# Altium PCB UVEEC LED Cube.PcbDoc
Units mm, origin at the board's own origin, x right, y up, seen from the top; angles counter-clockwise.
Board outline 40 x 40 mm, 2 copper layers (Top Layer, Bottom Layer); 10 components, 8 nets, 39 pads, 6 vias.
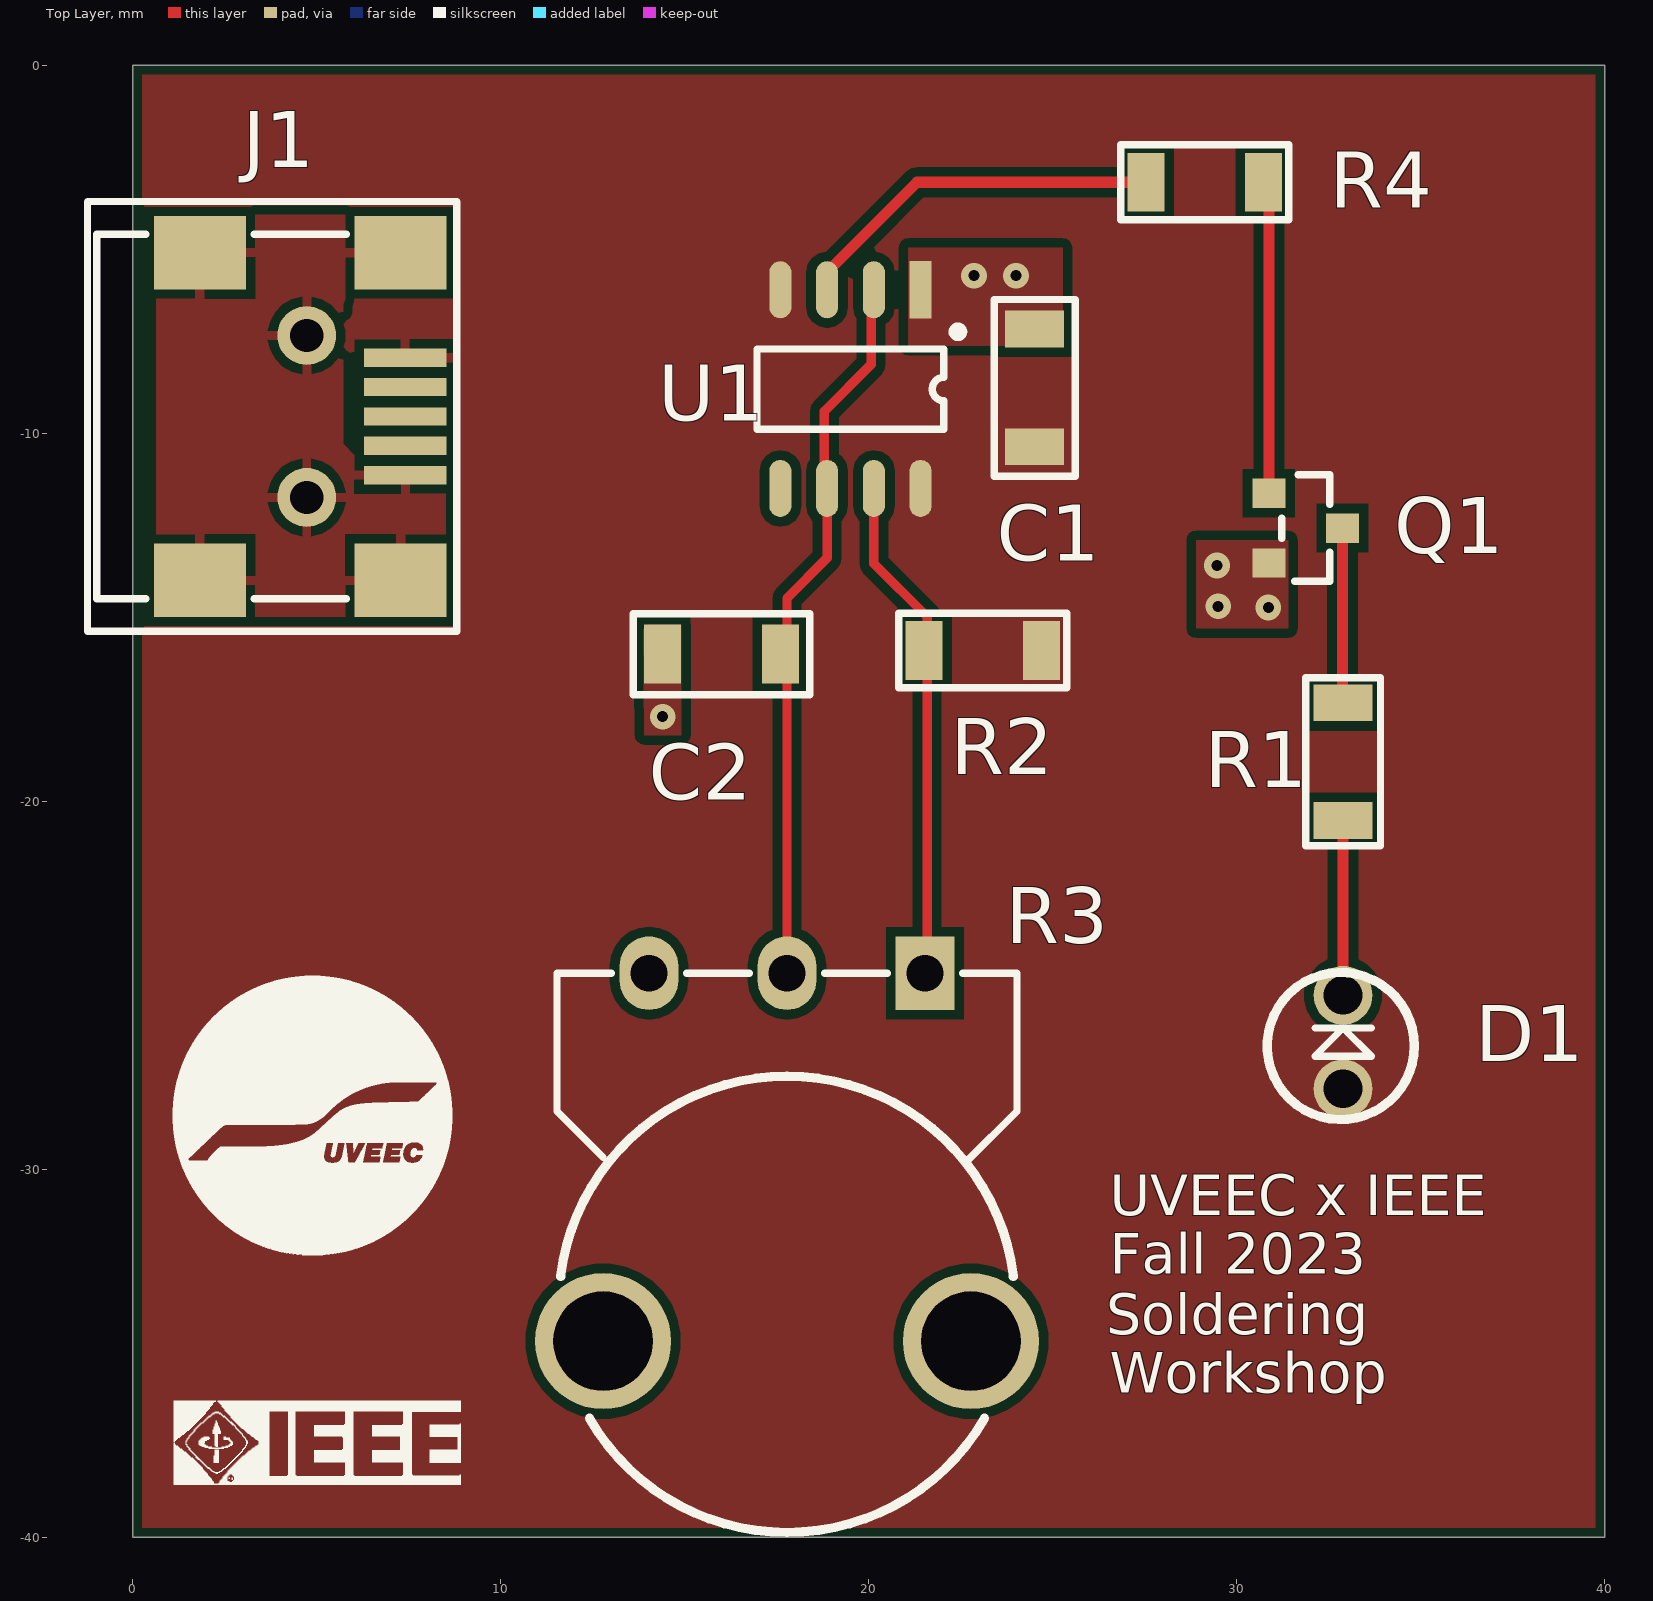
[diagram p0: Top Layer view]
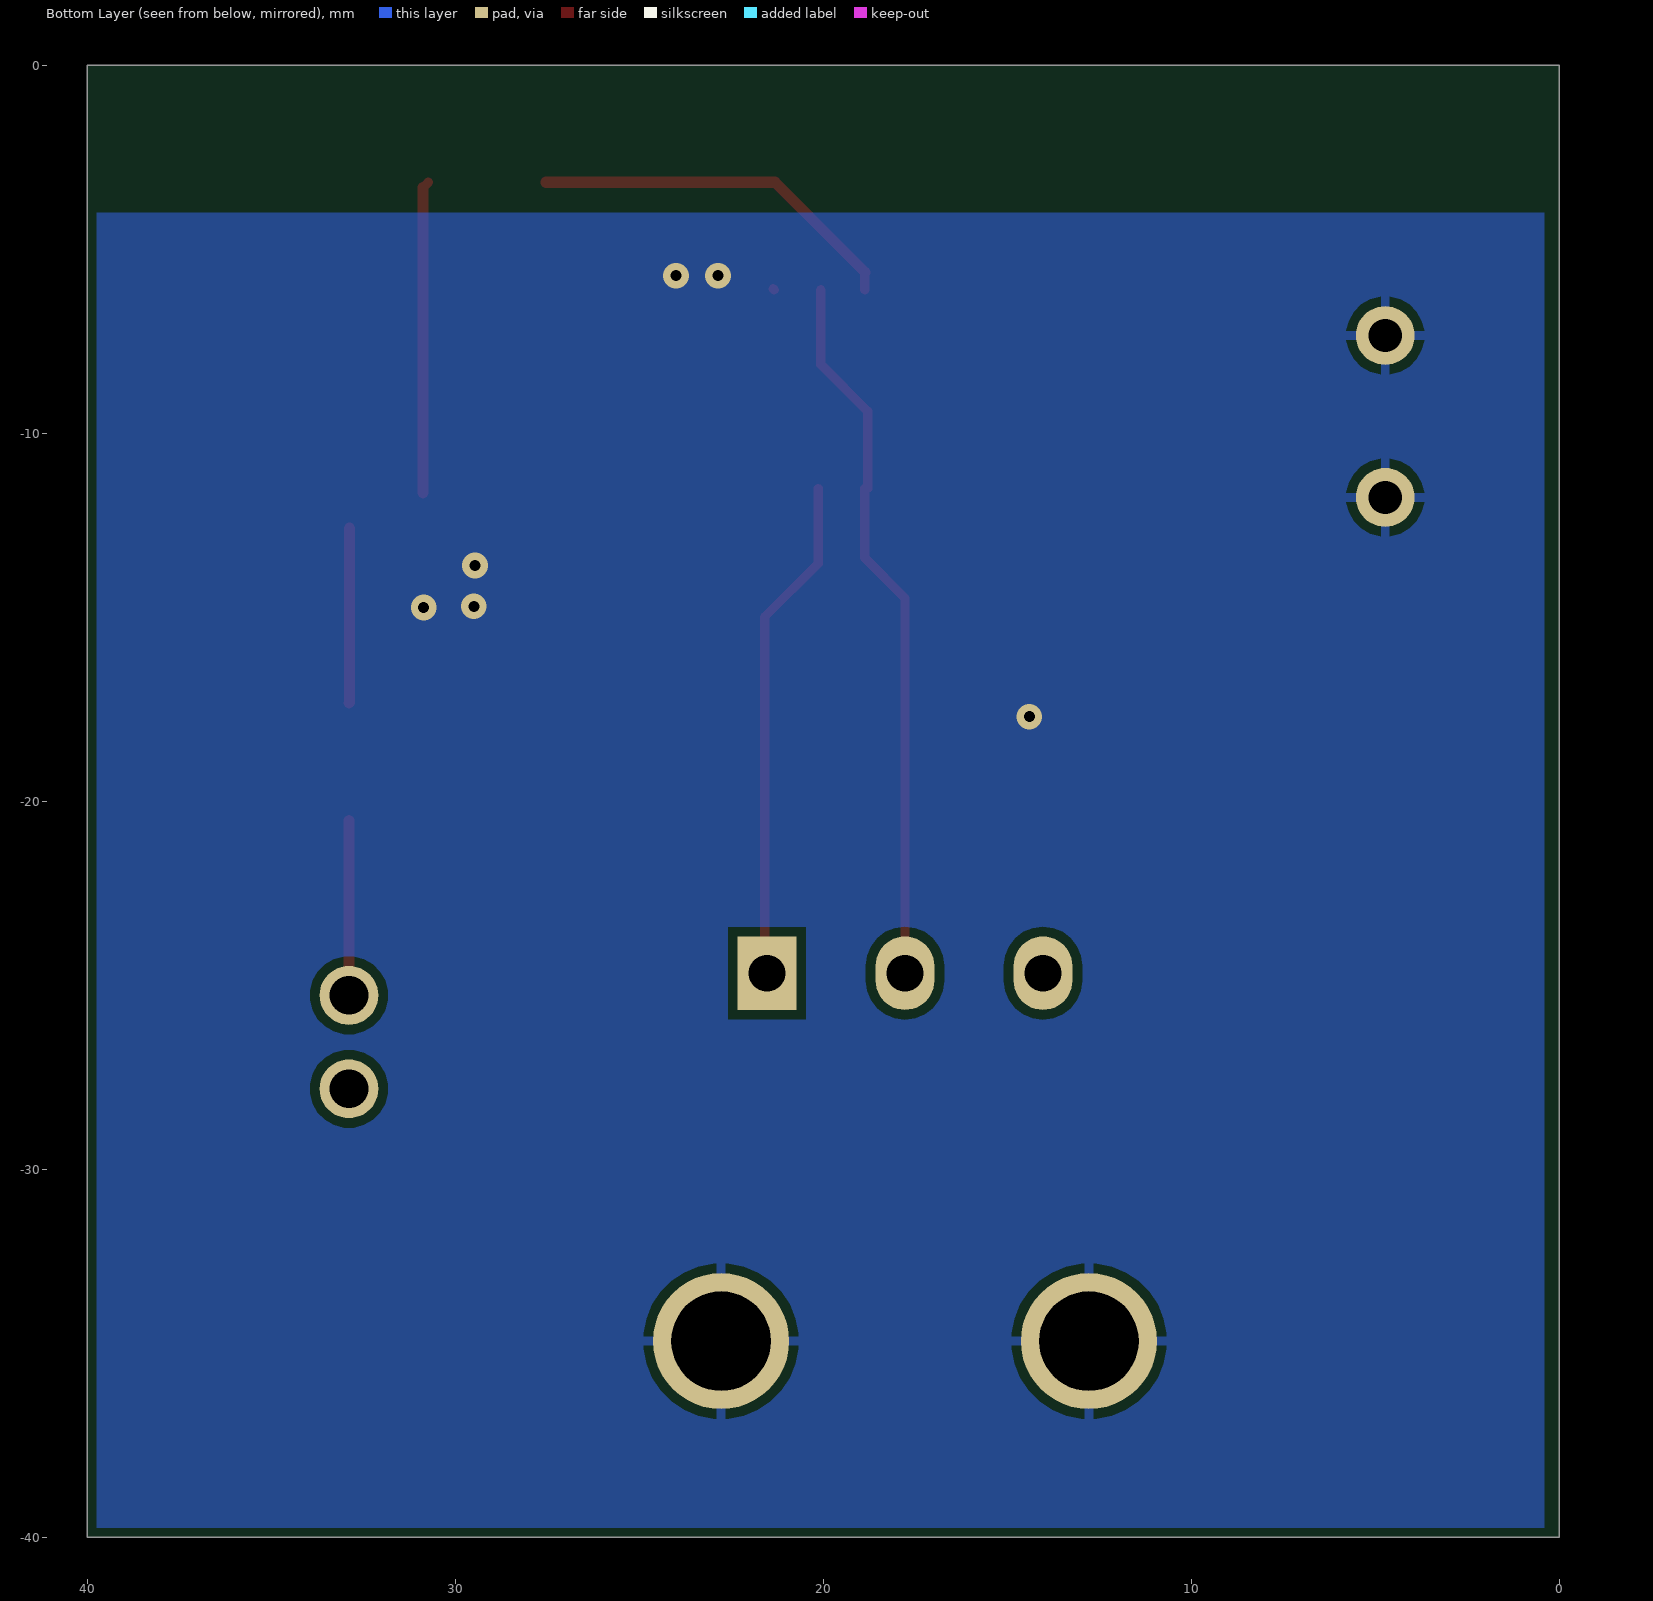
[diagram p1: Bottom Layer view, seen from below]
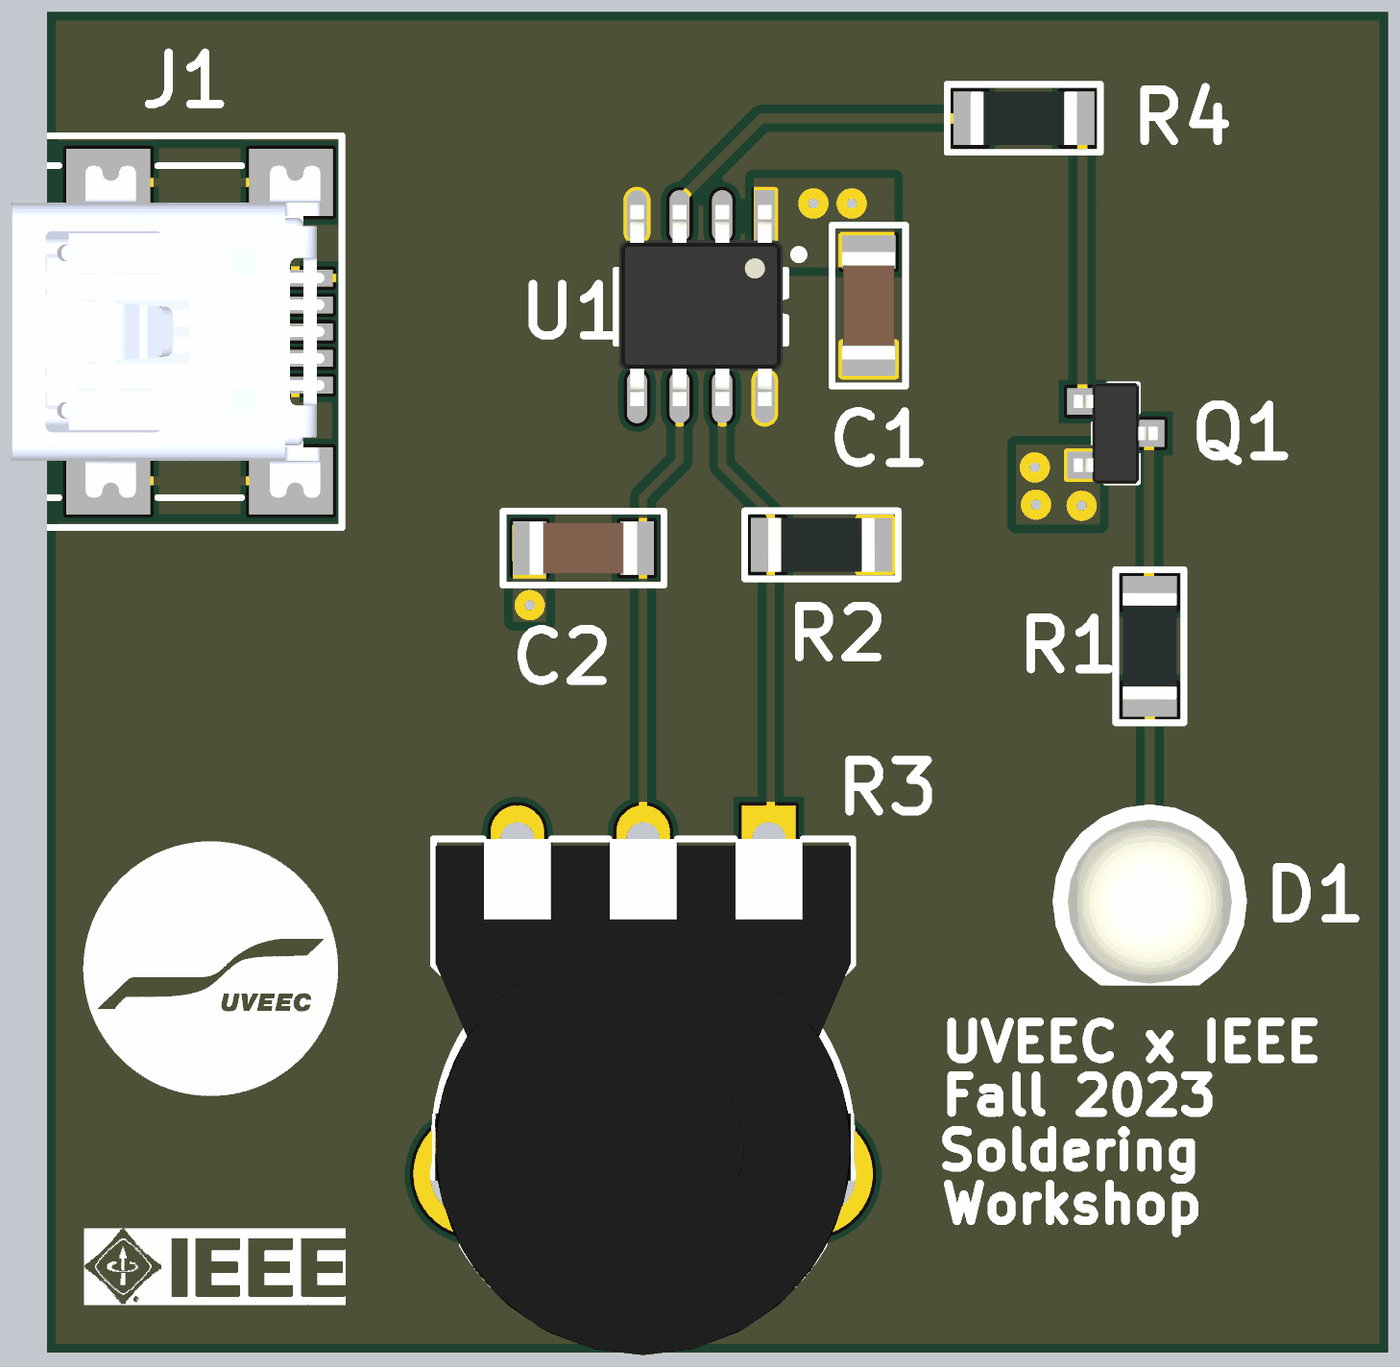
[diagram p2: 3D render of the assembled board from above, using the file's embedded part models]

## Layer stack, top to bottom
Top Solder: solder mask 0.0102, Solder Resist, Dk 3.5
Top Layer: signal copper 0.0356
Dielectric 1: dielectric 0.32, FR-4, Dk 4.8
Bottom Layer: signal copper 0.0356
Bottom Solder: solder mask 0.0102, Solder Resist, Dk 3.5

## Board outline
0,-40 40,-40 40,0 0,0

## Design rules (kind name [scope] priority, off if disabled: settings)
BoardOutlineClearance [All] p1: gap=0.254 ignorepadtopadclearanceinfootprint=FALSE except(0: Arc-SplitContinuation Track-SplitContinuation SMDPad-SplitContinuation THPad-SplitContinuation Via-SplitContinuation Fill-SplitContinuation Poly-SplitContinuation Region-SplitContinuation Text-SplitContinuation)
Clearance [All] p1: gap=0.254 ignorepadtopadclearanceinfootprint=FALSE except(0: SMDPad-Hole THPad-Hole Via-Hole Fill-Hole Poly-Hole Region-Hole Text-Hole)
Height [All] p1: minheight=0 maxheight=35 prefheight=12.7
HoleSize [All] p1: absolutevalues=TRUE maxlimit=3.5 minlimit=0.025 maxpercent=80.000 minpercent=20.000
MinimumSolderMaskSliver [All] p1: minsoldermaskwidth=0.2
PolygonConnect [All] p1: connectstyle=Direct reliefconductorwidth=0.254 reliefentries=4 polygonreliefangle="90 Angle" airgapwidth=0.254
RoutingVias [All] p1: holewidth=0.711 width=1.27 viastyle="Through Hole" minholewidth=0.711 minwidth=1.27 maxholewidth=0.711 maxwidth=1.27
SolderMaskExpansion [All] p1: expansion=0.102 istentingtop=FALSE
Width [All] p1: maxlimit=0.5 minlimit=0.254 preferedwidth=0.254 minimp=50.000000 maximp=50.000000 favimp=50.000000
27 further rules are at their usual default settings.

## Components (designator, comment, footprint, x,y, rotation, side; value= is the part's Value field where it differs from the comment)
C1 "1u" "Capacitor 1206" 24.511,-8.763 r90 top value=1uF
C2 "0.1u" "Capacitor 1206" 16,-16 r180 top value=100nF
D1 "HL3P-BF60-C00DD" "DIODE TH D 1.05 P 2.54" 32.893,-27.813 r90 top
J1 "10033527-N3112MLF" 10033527-N3112MLF 7.403,-9.54 r270 top
Q1 "MMBT4401-7-F" SOT-23-3 31.877,-12.573 r270 top
R1 "150Ω" "RESISTOR 1206" 32.893,-18.923 r270 top value=150R
R2 "10k" "Resistor 1206" 23.1,-15.9 r0 top value=10kR
R3 "1M Pot" PDB12-H4301-105BF 17.78,-34.671 r180 top value=1MR
R4 "150Ω" "Resistor 1206" 29.134,-3.175 r180 top value=150R
U1 "SA555DR" SOIC-8 21.409,-6.096 r270 top

## Footprints (in the part's own frame and the unit in brackets; to place one, negate y for a bottom-side part, rotate by r counter-clockwise, add the part's x,y. Pads: shape width x height; smd on the part's side, far side on the other; paste and mask are expansions set on the pad)
10033527-N3112MLF [mm]
  rect 0.5x2.25 smd: 1(-1.6,0) 2(-0.8,0) 3(0,0) 4(0.8,0) 5(1.6,0)
  rect 2x2.5 smd: 6(-4.45,-0.125) 6(-4.45,-5.575) 6(4.45,-0.125) 6(4.45,-5.575)
  round 1.6 hole 0.9: 6(-2.2,-2.675) 6(2.2,-2.675)
  silkscreen extent -5.84,-8.64 5.84,1.4, body extent -4.95,-8.45 4.95,0.87, height 3.95
"Capacitor 1206" [mm]
  rect 1x1.6 smd: 1(-1.6,0) 2(1.6,0)
  silkscreen extent -2.4,-1.1 2.4,1.1, body extent -1.6,-0.8 1.6,0.8, height 1.6
"DIODE TH D 1.05 P 2.54" [mm]
  round 1.6 hole 1.05: A(0,0) K(2.54,0)
  silkscreen extent -0.84,-1.94 3.16,2.06, body extent -1.23,-2.9 4.16,2.9, height 11.6
PDB12-H4301-105BF [mm]
  rect 1.6x2 hole 1: 1(-3.75,-10)
  oval 1.6x2 hole 1: 2(0,-10) 3(3.75,-10)
  round 3.7 hole 2.7: NPH1(-5,0) NPH2(5,0)
  silkscreen extent -6.25,-10 6.25,5.2, body extent -7.97,-10 7.97,5.4, height 29.33
"RESISTOR 1206" [mm]
  rect 1x1.6 smd: 1(-1.6,0) 2(1.6,0)
  silkscreen extent -2.29,-1.02 2.29,1.02, body extent -1.6,-0.8 1.6,0.8, height 0.55
"Resistor 1206" [mm]
  rect 1x1.6 smd: 1(-1.6,0) 2(1.6,0)
  silkscreen extent -2.29,-1.02 2.29,1.02, body extent -1.6,-0.8 1.6,0.8, height 0.55
SOIC-8 [mm]
  rect 1.55x0.6 smd: 1(0,0)
  oval 1.55x0.6 smd: 2(0,-1.27) 3(0,-2.54) 4(0,-3.81) 5(5.4,-3.81) 6(5.4,-2.54) 7(5.4,-1.27) 8(5.4,0)
  silkscreen extent 1.02,-4.44 3.79,1.14, body extent -0.33,-4.36 5.67,0.55, height 1.75
SOT-23-3 [mm]
  rect 0.8x0.9 smd: 1(0,1) 2(0.95,-1) 3(-0.95,-1)
  silkscreen extent -1.45,-0.65 1.45,0.65, body extent -1.5,-1.25 1.5,1.25, height 1.2

## Part data
C1: library part CL31B105KAHNFNE, "Cap Ceramic 1uF 25V X7R 10% SMD 1206 125°C Embossed T/R", Case Code (Imperial)=1206, Case Code (Metric)=3216, Dielectric=X7R, Manufacturer=Samsung, Max Operating Temperature=125°C, Min Operating Temperature=-55°C, Supplier Part Number=1276-3086-1-ND, Tolerance=10%, Voltage Rating=25V, Case/Package=1206, Category="Ceramic Capacitors", ComponentLink1Description=https://datasheet.ciiva.com/25731/cl31b105kahnfne-25731284.pdf?src-supplier=Digi-Key, ComponentLink1URL=https://datasheet.ciiva.com/25731/cl31b105kahnfne-25731284.pdf?src-supplier=Digi-Key, Construction=Flat, Depth=1.6mm, Height=1.6mm, Length=3.2mm, Manufacturer Part Number=CL31B105KAHNFNE, Mounting Technology="Surface Mount", Packaging="Tape and Reel", Pricing="1=0.13, 10=0.094, 50=0.0534, 100=0.0443, 500=0.03106, 1000=0.02571 (USD)", Radiation Hardening=No, RoHS=Yes, RoHS Compliant=Yes, Series=CL, Stock=266403, Supplier=Digi-Key
C2: library part CL31B104KBCNNNC, "Multilayer Ceramic Capacitor, 0.1 uF, 50 V, ± 10%, X7R, 1206 [3216 Metric]", Case Code (Imperial)=1206, Case Code (Metric)=3216, Dielectric=X7R, Manufacturer=Samsung, Max Operating Temperature=125°C, Min Operating Temperature=-55°C, Supplier Part Number=1276-1017-1-ND, Tolerance=10%, Voltage=50V, Case/Package=1206, Category="Ceramic Capacitors", ComponentLink1Description=https://datasheet.ciiva.com/25710/cl31b104kbcnnnc-25710293.pdf?src-supplier=Digi-Key, ComponentLink1URL=https://datasheet.ciiva.com/25710/cl31b104kbcnnnc-25710293.pdf?src-supplier=Digi-Key, ComponentLink2Description=https://datasheet.ciiva.com/29201/451941-da-01-en-vs-kondensator-1206-29201689.pdf?src-supplier=Conrad, ComponentLink2URL=https://datasheet.ciiva.com/29201/451941-da-01-en-vs-kondensator-1206-29201689.pdf?src-supplier=Conrad, ComponentLink3Description=https://datasheet.ciiva.com/16298/cl05b104kq5nnnc-16298186.pdf?src-supplier=Future+Electronics, ComponentLink3URL=https://datasheet.ciiva.com/16298/cl05b104kq5nnnc-16298186.pdf?src-supplier=Future+Electronics, Depth=1.6mm, Height=0.85mm, Lead Free="Lead Free", Length=3.2mm, Manufacturer Part Number=CL31B104KBCNNNC, Material=Ceramic, Mounting Technology="Surface Mount", Packaging="Tape and Reel", Pricing="1=0.11, 10=0.078, 50=0.0444, 100=0.0368, 500=0.02582, 1000=0.02137 (USD)", RoHS=Yes, RoHS Compliant=Yes, Series=CL, Stock=760991, Supplier=Digi-Key, Voltage Rating=50V, Voltage Rating (DC)=50V
D1: "LED Yellow Green 570nm 20mA 2-Pin Through Hole T/R", Manufacturer=Broadcom, Supplier Part Number=516-HL3P-BF60-C00DDCT-ND, Manufacturer Part Number=HL3P-BF60-C00DD, Pricing="1=0.58, 10=0.384, 100=0.2541, 1000=0.19616 (USD)", RoHS=No, Stock=26786, Supplier=Digi-Key
J1: "MINI USB 2.0- AB Type Receptacle conn. Right Angle Surface Mount Type", Manufacturer="Amphenol ICC / FCI", Package Quantity=750, Supplier Part Number=609-10033527-N3112MLFCT-ND, Category=Connectors, ComponentLink1Description=https://datasheet.ciiva.com/3094/10033527-3094701.pdf?src-supplier=Avnet, ComponentLink1URL=https://datasheet.ciiva.com/3094/10033527-3094701.pdf?src-supplier=Avnet, Contact Material="Copper Alloy", Contact Plating=Gold, Depth=9.2mm, Gender=Female, Housing Material=Polymer, Length=9.9mm, Manufacturer Part Number=10033527-N3112MLF, Mounting Technology="Surface Mount", Number of Ports=1, Orientation="Right Angle", Packaging="Tape and Reel", Pitch=0.8mm, Pricing="1=0.51, 10=0.446, 25=0.4076, 50=0.3838, 100=0.3677, 250=0.33576 (USD)", RoHS=Yes, RoHS Compliant=Yes, Stock=11754, Supplier=Digi-Key, Termination=Solder
Q1: "NPN Ic=600mA Vceo=40V hfe=100~300 fT=250MHz P=310mW SOT-23", Case/Package=SOT-23, Clock Frequency=250MHz, Collector Base Voltage (VCBO)=60V, Collector Emitter Breakdown Voltage=40V, Collector Emitter Saturation Voltage=750mV, Continuous Collector Current=600mA, Emitter Base Voltage (VEBO)=6V, Manufacturer=Diodes, Max Operating Temperature=150°C, Max Power Dissipation=300mW, Min Operating Temperature=-55°C, Package Quantity=3000, Power Dissipation=310mW, Supplier Part Number=MMBT4401-FDICT-ND, Category=BJTs, Collector Emitter Voltage (VCEO)=40V, Collector-emitter Voltage-Max=750mV, ComponentLink1Description=https://datasheet.ciiva.com/15139/getdatasheetpartid-91436-15139165.pdf?src-supplier=Verical, ComponentLink1URL=https://datasheet.ciiva.com/15139/getdatasheetpartid-91436-15139165.pdf?src-supplier=Verical, ComponentLink2Description=https://datasheet.ciiva.com/972/ds30039-972547.pdf?src-supplier=Digi-Key, ComponentLink2URL=https://datasheet.ciiva.com/972/ds30039-972547.pdf?src-supplier=Digi-Key, ComponentLink3Description=https://datasheet.ciiva.com/972/ds30039-972548.pdf?src-supplier=Digi-Key, ComponentLink3URL=https://datasheet.ciiva.com/972/ds30039-972548.pdf?src-supplier=Digi-Key, ComponentLink4Description=https://datasheet.ciiva.com/972/ds30039-972549.pdf?src-supplier=Digi-Key, ComponentLink4URL=https://datasheet.ciiva.com/972/ds30039-972549.pdf?src-supplier=Digi-Key, ComponentLink5Description=https://datasheet.ciiva.com/16199/ds30039-16199054.pdf?src-supplier=Future+Electronics, ComponentLink5URL=https://datasheet.ciiva.com/16199/ds30039-16199054.pdf?src-supplier=Future+Electronics, ComponentLink6Description=https://datasheet.ciiva.com/11201/ds30039-11201820.pdf?src-supplier=Avnet, ComponentLink6URL=https://datasheet.ciiva.com/11201/ds30039-11201820.pdf?src-supplier=Avnet, Frequency=250MHz, Gain Bandwidth Product=250MHz, Height=1mm, hFE Min=100, Lead Free="Lead Free", Length=3.05mm, Manufacturer Part Number=MMBT4401-7-F, Max Breakdown Voltage=40V, Max Collector Current=600mA, Mounting Technology="Surface Mount", Number of Elements=1, Packaging="Tape and Reel", Pins=3, Polarity=NPN, Pricing="1=0.14, 10=0.098, 100=0.0528, 500=0.04146, 1000=0.02878 (USD)", Radiation Hardening=No, Reach SVHC Compliant=Yes, RoHS=Yes, RoHS Compliant=Yes, Series="Automotive, AEC-Q101", Stock=950358, Supplier=Digi-Key, Transition Frequency=250MHz, Voltage Rating (DC)=40V, Weight=0.000282oz, Width=1.4mm
R1 R4: library part RMCF1206FG150R, "RES 150 OHM 1% 1/4W 1206", Case Code (Imperial)=1206, Case Code (Metric)=3216, Manufacturer="Stackpole Electronics", Max Operating Temperature=155°C, Max Power Dissipation=250mW, Min Operating Temperature=-55°C, Ratings=AEC-Q200, Supplier Part Number=RMCF1206FG150RCT-ND, Temperature Coefficient=100ppm/°C, Tolerance=1%, Case/Package=1206, Category="Chip SMD Resistors", ComponentLink1Description=https://www.seielect.com/catalog/SEI-RMCF_RMCP.pdf?src-supplier=Avnet, ComponentLink1URL=https://www.seielect.com/catalog/SEI-RMCF_RMCP.pdf?src-supplier=Avnet, ComponentLink2Description=https://www.seielect.com/catalog/sei-rmcf_rmcp.pdf?src-supplier=Digi-Key, ComponentLink2URL=https://www.seielect.com/catalog/sei-rmcf_rmcp.pdf?src-supplier=Digi-Key, ComponentLink3Description=https://www.seielect.com/catalog/SEI-Packaging.pdf?src-supplier=Digi-Key, ComponentLink3URL=https://www.seielect.com/catalog/SEI-Packaging.pdf?src-supplier=Digi-Key, Contact Plating=Tin,Matte, Features="Automotive AEC-Q200", Manufacturer Part Number=RMCF1206FG150R, Mounting Technology="Surface Mount", Number of Terminations=2, Packaging="Tape and Reel", Pricing="1=0.1, 10=0.023, 50=0.0146, 100=0.0122, 500=0.00832, 1000=0.00718, 5000=0.00526 (USD)", Radiation Hardening=No, RoHS=Yes, RoHS Compliant=Yes, Series=RMCF, Stock=105204, Supplier=Digi-Key
R2: library part RMCF1206FT10K0, "Res Thick Film 1206 10K Ohm 1% 0.25W ±100ppm/°C Molded SMD Paper T/R", Case Code (Imperial)=1206, Case Code (Metric)=3216, Manufacturer="Stackpole Electronics", Max Operating Temperature=155°C, Max Power Dissipation=250mW, Min Operating Temperature=-55°C, Ratings=AEC-Q200, Supplier Part Number=RMCF1206FT10K0CT-ND, Temperature Coefficient=100ppm/°C, Tolerance=1%, Voltage Rating=200V, Case/Package=1206, Category="Chip SMD Resistors", ComponentLink1Description=https://datasheet.ciiva.com/15193/getdatasheetpartid-369489-15193659.pdf?src-supplier=Verical, ComponentLink1URL=https://datasheet.ciiva.com/15193/getdatasheetpartid-369489-15193659.pdf?src-supplier=Verical, Construction=Rectangular, Contact Plating=Tin,Matte, Depth=1.6mm, Features="Automotive AEC-Q200", Height=0.028inch, Lead Free="Lead Free", Length=3.2mm, Manufacturer Part Number=RMCF1206FT10K0, Military Standard=Not, Mounting Technology="Surface Mount", Number of Terminations=2, Packaging="Tape and Reel", Power Rating=250mW, Pricing="1=0.1, 10=0.023, 50=0.0146, 100=0.0122, 500=0.00832, 1000=0.00718 (USD)", Radiation Hardening=No, RoHS=Yes, RoHS Compliant=Yes, Series=RMCF, Stock=1414203, Supplier=Digi-Key, Width=0.063inch
R3: library part PDB12-H4301-105BF, "Res Carbon Film POT 1M Ohm 20% 2/25W 1(Elec)/1(Mech)Turn 6mm (12.4 X 34.6mm) Pin Bracket Mount/Through Hole", Manufacturer=Bourns, Max Operating Temperature=50°C, Max Power Dissipation=80mW, Min Operating Temperature=-10°C, Package Quantity=100, Resistor Type=Carbon, Supplier Part Number=PDB12-H4301-105BF-ND, Tolerance=20%, Category="Variable Resistors and Potentiometers", ComponentLink1Description=https://datasheet.ciiva.com/26913/getdatasheetpartid-380329-26913658.pdf?src-supplier=Verical, ComponentLink1URL=https://datasheet.ciiva.com/26913/getdatasheetpartid-380329-26913658.pdf?src-supplier=Verical, ComponentLink2Description=https://datasheet.ciiva.com/8702/pdb12-8702733.pdf?src-supplier=Avnet, ComponentLink2URL=https://datasheet.ciiva.com/8702/pdb12-8702733.pdf?src-supplier=Avnet, Depth=12.4mm, Length=12.4mm, Manufacturer Part Number=PDB12-H4301-105BF, Military Standard=Not, Mounting Technology="Through Hole,Brackets", Number of Gangs=1, Number of Turns=1, Packaging=Bulk, Power Rating=80mW, Pricing="1=1.28, 10=1.133, 25=1.02, 50=0.9822, 100=0.9444, 250=0.88768, 500=0.75548, 1000=0.69882, 5000=0.57416 (USD)", Radiation Hardening=No, RoHS=Yes, RoHS Compliant=Yes, Series=PDB12, Stock=887, Supplier=Digi-Key, Taper=Linear, Technology="CARBON FILM", Termination=Pin, Type=Potentiometer
U1: "IC OSC SGL TIMER 100KHZ 8-SOIC", Case/Package=SOIC, Frequency=100kHz, High Level Output Current=-200mA, Low Level Output Current=200mA, Manufacturer="Texas Instruments", Max Operating Temperature=85°C, Max Supply Voltage=16V, Min Operating Temperature=-40°C, Min Supply Voltage=4.5V, Operating Supply Current=10mA, Package Quantity=2500, Quiescent Current=15mA, Supplier Part Number=296-14635-1-ND, Supply Current=2mA, Category="Timers and Oscillators", ComponentLink1Description=https://datasheet.ciiva.com/34303/1998263-34303726.pdf?src-supplier=Jameco, ComponentLink1URL=https://datasheet.ciiva.com/34303/1998263-34303726.pdf?src-supplier=Jameco, ComponentLink2Description=https://datasheet.ciiva.com/1592/1748907-1592972.pdf?src-supplier=Newark, ComponentLink2URL=https://datasheet.ciiva.com/1592/1748907-1592972.pdf?src-supplier=Newark, ComponentLink3Description=https://datasheet.ciiva.com/46413/1834004-46413322.pdf?src-supplier=Element14, ComponentLink3URL=https://datasheet.ciiva.com/46413/1834004-46413322.pdf?src-supplier=Element14, ComponentLink4Description=https://datasheet.ciiva.com/1233/sa555-1233135.pdf?src-supplier=Digi-Key, ComponentLink4URL=https://datasheet.ciiva.com/1233/sa555-1233135.pdf?src-supplier=Digi-Key, ComponentLink5Description=https://datasheet.ciiva.com/1233/sa555-1233134.pdf?src-supplier=Digi-Key, ComponentLink5URL=https://datasheet.ciiva.com/1233/sa555-1233134.pdf?src-supplier=Digi-Key, ComponentLink6Description=https://datasheet.ciiva.com/1233/sa555-1233136.pdf?src-supplier=Digi-Key, ComponentLink6URL=https://datasheet.ciiva.com/1233/sa555-1233136.pdf?src-supplier=Digi-Key, ComponentLink7Description=https://datasheet.ciiva.com/14274/se555m-14274469.pdf?src-supplier=Avnet, ComponentLink7URL=https://datasheet.ciiva.com/14274/se555m-14274469.pdf?src-supplier=Avnet, ComponentLink8Description=https://datasheet.ciiva.com/15152/getdatasheetpartid-247856-15152619.pdf?src-supplier=Verical, ComponentLink8URL=https://datasheet.ciiva.com/15152/getdatasheetpartid-247856-15152619.pdf?src-supplier=Verical, Lead Free="Lead Free", Manufacturer Part Number=SA555DR, Mounting Technology="Surface Mount", Number of Timers/Counters=1, Packaging="Tape and Reel", Pins=8, Pricing="1=0.38, 10=0.31, 25=0.2836, 100=0.2109, 250=0.19116, 500=0.1582, 1000=0.11864 (USD)", Radiation Hardening=No, Reach SVHC Compliant=No, RoHS=Yes, RoHS Compliant=Yes, Series=-, Stock=21612, Supplier=Digi-Key, Weight=0.002561oz

## Via types
v1: diameter 0.7, hole 0.3, Top Layer to Bottom Layer, 6 vias

## Nets (pads, with @x,y where several pads share a name; then routed paths per layer and width w, separated by ;. In a path a pad name is that pad's centre, name@x,y a point inside that pad or via, vN(x,y) a via of type N, cw(c..) or ccw(c..) an arc to the next point about the centre after c; other vN are vias at no path point)
+5V: C1.1 D1.A J1.1 R2.2 U1.4 U1.8
GND: C1.2 C2.2 J1.5 J1.6 Q1.2 R3.NPH1 R3.NPH2 U1.1 | length 0
  Top Layer w0.254: U1.1@21.336,-6.096 U1.1@21.362,-6.07
  other v1: 14.4,-17.7 30.861,-14.732 29.5,-14.7 29.464,-13.589 22.86,-5.715 24.003,-5.715
NetC2_1: C2.1 R3.2 U1.2 U1.6 | length 19.6
  Top Layer w0.254: R3.2 17.78,-17.399 17.78,-14.478 18.869,-13.389 U1.6 ; U1.6@18.796,-11.496 18.796,-9.398 20.066,-8.128 U1.2@20.066,-6.096
NetD1_K: D1.K R1.2 | length 4.8
  Top Layer w0.3: D1.K R1.2
NetQ1_1: Q1.1 R1.1 | length 4.8
  Top Layer w0.3: Q1.1 32.877,-17.307 R1.1
NetQ1_3: Q1.3 R4.1 | length 8.5
  Top Layer w0.254: R4.1 R4.1@30.877,-3.318
  Top Layer w0.3: Q1.3 R4.1@30.877,-3.318
NetR2_1: R2.1 R3.1 U1.7 | length 14
  Top Layer w0.254: U1.7 20.139,-13.535 21.59,-14.986 21.59,-24.611 R3.1 R3.1@21.53,-24.471
NetR4_2: R4.2 U1.3 | length 10.2
  Top Layer w0.254: U1.3 U1.3@18.869,-5.621
  Top Layer w0.3: U1.3@18.869,-5.621 21.315,-3.175 R4.2
pads on no net: J1.2 J1.3 J1.4 R3.3 U1.5

## Polygon pours and split planes (outlines as drawn)
+5V on Top Layer "+5V_L01_P016" (solid, pour order 16): 0.085,-0.1 40.085,-0.1 40.085,-40.1 0.085,-40.1
GND on Top Layer "GND_L01_P014" (solid, pour order 14): 13.876,-15.179 13.896,-15.2 14.9,-15.2 14.9,-18.2 13.9,-18.2
GND on Top Layer "GND_L01_P013" (solid, pour order 13): 31.4,-12.9 31.4,-15.225 31.4,-15.3 28.9,-15.3 28.9,-12.9
GND on Top Layer "GND_L01_P012" (solid, pour order 12): 21.082,-4.953 25.273,-4.953 25.273,-7.62 21.082,-7.62
GND on Top Layer "GND_L01_P004" (solid, pour order 4): 0.635,-4.064 8.509,-4.064 8.509,-6.096 6.096,-6.096 5.715,-6.477 5.715,-10.287 6.35,-10.922 8.509,-10.922 8.509,-14.859 8.382,-14.986 0.635,-14.986
GND on Bottom Layer "GND_L02_P011" (solid, pour order 11): 0.4,-4 40.4,-4 40.4,-44 0.4,-44

## Silkscreen, mask and mechanical layers (free items; w line width, h text height)
Top Overlay:
  drawing of 10 lines, arcs and shapes, not listed
  text "UVEEC x IEEE" at 26.554,-31.246 h1.1
  text "Fall 2023" at 26.554,-32.846 h1.1
  text "Soldering" at 26.454,-34.479 h1.1
  text "Workshop" at 26.554,-36.079 h1.1